# EAGLE board macroTriggerBRD (EAGLE 9.7.0)
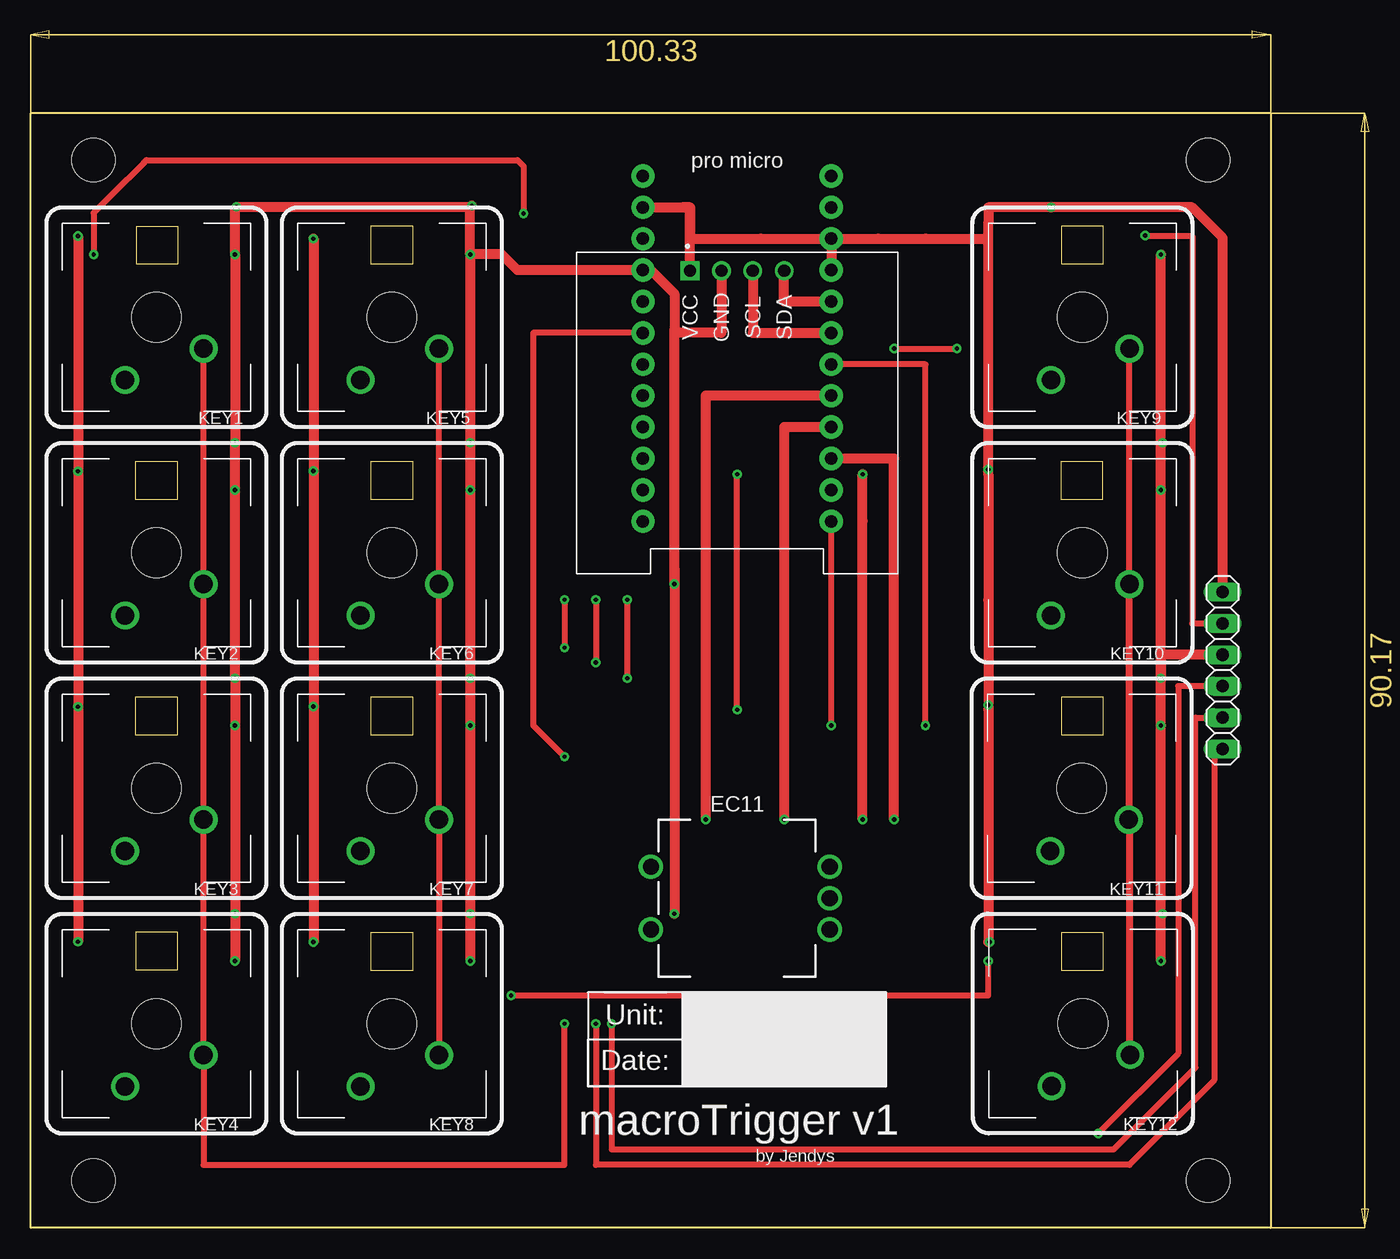
[diagram p0: board, top side]
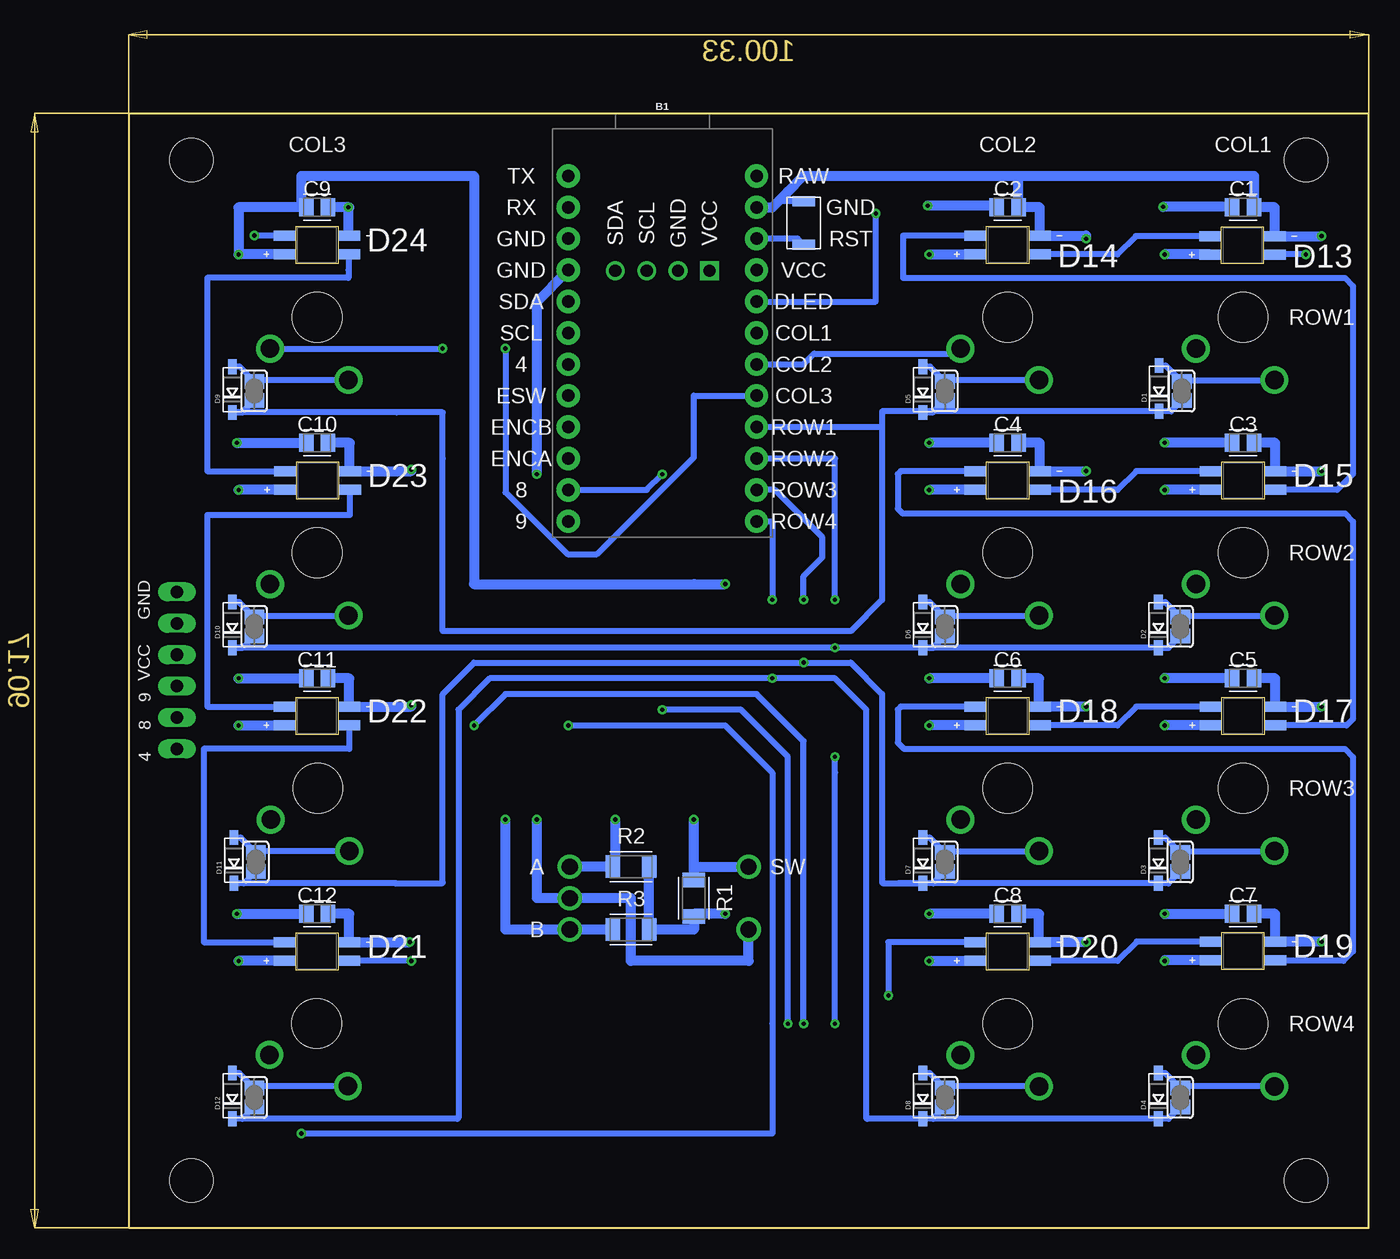
[diagram p1: board, bottom side, seen from below]

Size 100.33 x 90.17 mm. Coordinates in mm from the lower left corner, seen from the top.
Outline: 100.33,0 0,0 0,90.17 100.33,90.17 100.33,0
Copper layers (1*16): Top 0.035mm / dielectric 1.5mm / Bottom 0.035mm
Design rules "Fusion Electronics Design Rules": minimum track width 6mil, minimum drill 0.35mm, track to track 0.2mm, track to pad 0.2mm, pad to pad 0.2mm, via to via 0.2mm, smd to smd 0.2mm, copper to edge 0.2mm, drill to drill 0.2mm, minimum pad ring 10mil, minimum via ring 8mil, stop-mask expansion 4mil, vias tented up to drill 0mil, thermal gap 10mil
Holes 3.5 mm at 5.08,86.36 5.08,3.81 95.25,86.36 95.25,3.81

## Footprints (pad centres in the part's own frame; a part is rotated, then mirrored left to right if it is on the bottom)
SPARKFUN_PRO_MICRO = drill 1.016 pad 1.88: 1 -7.62,12.7; 2 -7.62,10.16; 3 -7.62,7.62; 4 -7.62,5.08; 5 -7.62,2.54; 6 -7.62,0; 7 -7.62,-2.54; 8 -7.62,-5.08; 9 -7.62,-7.62; 10 -7.62,-10.16; 11 -7.62,-12.7; 12 -7.62,-15.24; 13 7.62,-15.24; 14 7.62,-12.7; 15 7.62,-10.16; 16 7.62,-7.62; 17 7.62,-5.08; 18 7.62,-2.54; 19 7.62,0; 20 7.62,2.54; 21 7.62,5.08; 22 7.62,7.62; 23 7.62,10.16; 24 7.62,12.7
CAPC2012X110 = smd 1.165 x 1.465: 1 -0.875,0; 2 0.875,0
SOD-123 = smd 1.2 x 0.7: A 1.85,0; C -1.85,0
LED_SK6812-E = smd 1.8 x 0.82: 1 2.6,0.75; 2 2.6,-0.75; 3 -2.6,-0.75; 4 -2.6,0.75
ROTARY_ENC_PLAIN = drill 1.3: A 7.493,-2.54; B 7.493,2.54; C 7.493,0; SW+ -6.985,2.54; SW- -6.985,-2.54
CHERRY-MX = drill 1.5 pad 2.184: SW1 -3.81,2.54; SW2 2.54,5.08 | hole 4: 0,0
RESC3216X70 = smd 1.165 x 1.815: 1 -1.475,0; 2 1.475,0
B3U-1000P(M) = smd 0.8 x 1.8: 1 -1.75,0; 2 1.75,0
SJ = smd 1.168 x 1.6: 1 -0.762,0; 2 0.762,0
MODULE_DM-OLED096-636 = drill 1 square: 1 -3.81,11.5 | drill 1: 2 -1.27,11.5; 3 1.27,11.5; 4 3.81,11.5
1X06 = drill 1.016 long: 1 -6.35,0; 2 -3.81,0; 3 -1.27,0; 4 1.27,0; 5 3.81,0; 6 6.35,0

## Placement (x,y rotation side)
B1  SPARKFUN_PRO_MICRO  [SPARKFUN_PRO_MICRO]  57.15,72.39 0 bottom
C1  [CAPC2012X110]  10.16,82.55 180 bottom
C2  [CAPC2012X110]  29.21,82.55 180 bottom
C3  [CAPC2012X110]  10.16,63.5 180 bottom
C4  [CAPC2012X110]  29.21,63.5 180 bottom
C5  [CAPC2012X110]  10.16,44.45 180 bottom
C6  [CAPC2012X110]  29.21,44.45 180 bottom
C7  [CAPC2012X110]  10.16,25.4 180 bottom
C8  [CAPC2012X110]  29.21,25.4 180 bottom
C9  [CAPC2012X110]  85.09,82.55 180 bottom
C10  [CAPC2012X110]  85.09,63.5 180 bottom
C11  [CAPC2012X110]  85.09,44.45 180 bottom
C12  [CAPC2012X110]  85.09,25.4 180 bottom
D1  [SOD-123]  16.96,67.9 90 bottom
D2  [SOD-123]  17.02,48.77 90 bottom
D3  [SOD-123]  17.02,29.72 90 bottom
D4  [SOD-123]  17.02,10.67 90 bottom
D5  [SOD-123]  36.07,67.8 90 bottom
D6  [SOD-123]  36.07,48.77 90 bottom
D7  [SOD-123]  36.07,29.72 90 bottom
D8  [SOD-123]  36.07,10.67 90 bottom
D9  [SOD-123]  91.95,67.8 90 bottom
D10  [SOD-123]  91.95,48.77 90 bottom
D11  [SOD-123]  91.82,29.72 90 bottom
D12  [SOD-123]  91.95,10.67 90 bottom
D13  SK6812-EJ  [LED_SK6812-E]  10.2,79.47 180 bottom
D14  SK6812-EJ  [LED_SK6812-E]  29.21,79.5 180 bottom
D15  SK6812-EJ  [LED_SK6812-E]  10.16,60.45 180 bottom
D16  SK6812-EJ  [LED_SK6812-E]  29.21,60.45 180 bottom
D17  SK6812-EJ  [LED_SK6812-E]  10.16,41.4 180 bottom
D18  SK6812-EJ  [LED_SK6812-E]  29.21,41.4 180 bottom
D19  SK6812-EJ  [LED_SK6812-E]  10.17,22.39 180 bottom
D20  SK6812-EJ  [LED_SK6812-E]  29.21,22.35 180 bottom
D21  SK6812-EJ  [LED_SK6812-E]  85.09,22.35 180 bottom
D22  SK6812-EJ  [LED_SK6812-E]  85.09,41.4 180 bottom
D23  SK6812-EJ  [LED_SK6812-E]  85.05,60.45 180 bottom
D24  SK6812-EJ  [LED_SK6812-E]  85.09,79.5 180 bottom
ENCODER_A  ENCODER-SWITCH  [ROTARY_ENC_PLAIN]  57.15,26.67 0 top
KEY1  CHERRY-MX  [CHERRY-MX]  10.16,73.66 180 top
KEY2  CHERRY-MX  [CHERRY-MX]  10.16,54.61 180 top
KEY3  CHERRY-MX  [CHERRY-MX]  10.16,35.56 180 top
KEY4  CHERRY-MX  [CHERRY-MX]  10.16,16.51 180 top
KEY5  CHERRY-MX  [CHERRY-MX]  29.21,73.66 180 top
KEY6  CHERRY-MX  [CHERRY-MX]  29.21,54.61 180 top
KEY7  CHERRY-MX  [CHERRY-MX]  29.21,35.56 180 top
KEY8  CHERRY-MX  [CHERRY-MX]  29.21,16.51 180 top
KEY9  CHERRY-MX  [CHERRY-MX]  85.09,73.66 180 top
KEY10  CHERRY-MX  [CHERRY-MX]  85.09,54.61 180 top
KEY11  CHERRY-MX  [CHERRY-MX]  85.03,35.56 180 top
KEY12  CHERRY-MX  [CHERRY-MX]  85.13,16.53 180 top
R1  10k  [RESC3216X70]  54.61,26.67 270 bottom
R2  10k  [RESC3216X70]  59.69,29.21 0 bottom
R3  10k  [RESC3216X70]  59.69,24.13 0 bottom
S1  B3U-1000P(M)  [B3U-1000P(M)]  45.72,81.28 90 bottom
SJ1  [SJ]  15.24,48.64 90 bottom
SJ2  [SJ]  15.24,29.59 90 bottom
SJ3  [SJ]  15.24,10.54 90 bottom
SJ4  [SJ]  34.29,67.69 90 bottom
SJ5  [SJ]  34.29,48.64 90 bottom
SJ6  [SJ]  34.29,29.59 90 bottom
SJ7  [SJ]  34.29,10.54 90 bottom
SJ8  [SJ]  90.17,67.69 90 bottom
SJ9  [SJ]  90.17,48.64 90 bottom
SJ10  [SJ]  90.04,29.59 90 bottom
SJ11  [SJ]  90.17,10.54 90 bottom
SJ14  [SJ]  15.11,67.69 90 bottom
U1  DM-OLED096-636  [MODULE_DM-OLED096-636]  57.15,65.91 0 top
U$1  PINHD-1X06_1X06M  [1X06]  96.44,45.09 270 top

## Library data of the parts
B1 = SparkFun-Boards
C1-C12 = Capacitor; CATEGORY: Capacitor; PACKAGE_SIZE: 0805; PACKAGE_TYPE: SMD; SUBCATEGORY: Ceramic Capacitors; TYPE: MLCC
D1-D12 = adafruit
D13-D24 = SK6812-E; AVAILABILITY: Not in stock; CHECK_PRICES: https://www.snapeda.com/parts/SK6812-E/DONGGUANG+OPSCO+OPTOELECTRONICS+CO.%252C+LTD/view-part/?ref=eda; DESCRIPTION: SK6812MINI-E is a smart LED control circuit and light emitting circuit in one controlled LED source, which has the shape of a 3528 LED chip.; MF: DONGGUANG OPSCO OPTOELECTRONICS CO., LTD; MP: SK6812-E; PACKAGE: Package; PRICE: None; SNAPEDA_LINK: https://www.snapeda.com/parts/SK6812-E/DONGGUANG+OPSCO+OPTOELECTRONICS+CO.%252C+LTD/view-part/?ref=snap
ENCODER_A = SparkFun-Switches_ryan_edits; SF_SKU: COM-09117
KEY1-KEY4 KEY6-KEY12 = cherrymx
KEY5 = cherrymx; SPICEPREFIX: B
R1-R3 = Resistor; CATEGORY: Resistor; SUB-CATEGORY: Fixed
S1 = Switch; CATEGORY: SWITCH; DESCRIPTION: Ultra-small Surface-mounting Tactile Switches with High Contact Reliability; MANUFACTURER: OMRON; OPERATING_TEMPERATURE: -25°C to +70°C at 60%RH max; PART_STATUS: ACTIVE; ROHS_COMPLIANCE: RoHS Compliant; SERIES: B3U; TYPE: Tactile
SJ1-SJ11 SJ14 = jumper
U1 = DM-OLED096-636; AVAILABILITY: Not in stock; CHECK_PRICES: https://www.snapeda.com/parts/DM-OLED096-636/Display+Module/view-part/?ref=eda; DESCRIPTION: 0.96” 128 X 64 MONOCHROME GRAPHIC OLED DISPLAY MODULE - I2C; MF: Display Module; MP: DM-OLED096-636; PACKAGE: Package; PRICE: None; SNAPEDA_LINK: https://www.snapeda.com/parts/DM-OLED096-636/Display+Module/view-part/?ref=snap
U$1 = Tinkercad

## Nets
GND: B1.3 B1.4 B1.23 C1.1 C2.1 C3.1 C4.1 C5.1 C6.1 C7.1 C8.1 C9.1 C10.1 C11.1 C12.1 D13.3 D14.3 D15.3 D16.3 D17.3 D18.3 D19.3 D20.3 D21.3 D22.3 D23.3 D24.3 ENCODER_A.C ENCODER_A.SW- S1.2 U1.1 U$1.1
N$1: B1.22 S1.1
N$2: D1.A KEY1.SW2 SJ14.2
N$3: D2.A KEY2.SW2 SJ1.2
N$4: B1.15 D2.C D6.C D10.C SJ1.1 SJ5.1 SJ9.1
N$5: D24.2 U$1.2
N$6: B1.10 ENCODER_A.A R3.1
N$7: D3.A KEY3.SW2 SJ2.2
N$8: B1.19 KEY1.SW1 KEY2.SW1 KEY3.SW1 KEY4.SW1
N$9: D13.2 D14.4
N$10: D4.A KEY4.SW2 SJ3.2
N$11: B1.20 D13.4
N$12: D5.A KEY5.SW2 SJ4.2
N$13: D6.A KEY6.SW2 SJ5.2
N$14: B1.13 D4.C D8.C D12.C SJ3.1 SJ7.1 SJ11.1
N$15: D7.A KEY7.SW2 SJ6.2
N$16: D8.A KEY8.SW2 SJ7.2
N$17: D9.A KEY9.SW2 SJ8.2
N$18: D10.A KEY10.SW2 SJ9.2
N$19: B1.14 D3.C D7.C D11.C SJ2.1 SJ6.1 SJ10.1
N$20: D11.A KEY11.SW2 SJ10.2
N$21: D12.A KEY12.SW2 SJ11.2
N$22: B1.11 U$1.5
N$23: B1.12 U$1.4
N$24: B1.7 U$1.6
N$25: D14.2 D15.4
N$26: D15.2 D16.4
N$27: B1.18 KEY5.SW1 KEY6.SW1 KEY7.SW1 KEY8.SW1
N$28: B1.9 ENCODER_A.B R2.1
N$29: B1.8 ENCODER_A.SW+ R1.1
N$30: B1.5 U1.4
N$31: B1.6 U1.3
N$32: B1.17 KEY9.SW1 KEY10.SW1 KEY11.SW1 KEY12.SW1
N$33: D16.2 D17.4
N$34: B1.16 D1.C D5.C D9.C SJ4.1 SJ8.1 SJ14.1
N$35: D17.2 D18.4
N$37: D18.2 D19.4
N$38: D19.2 D20.4
N$39: D20.2 D21.4
N$40: D21.2 D22.4
N$42: D22.2 D23.4
N$43: D23.2 D24.4
RAW: B1.24
VCC: B1.21 C1.2 C2.2 C3.2 C4.2 C5.2 C6.2 C7.2 C8.2 C9.2 C10.2 C11.2 C12.2 D13.1 D14.1 D15.1 D16.1 D17.1 D18.1 D19.1 D20.1 D21.1 D22.1 D23.1 D24.1 R1.2 R2.2 R3.2 U1.2 U$1.3

## Tracks (layer width: path | path; a pad name or v marks a point on that pad's centre or on a via)
GND  (via drill 0.35)
  Top 0.8: 77.47,80.01 v77.47,61.34 77.47,60.96 77.47,50.8 v77.47,42.29 77.47,41.91 77.47,23.11 v77.6,23.11 | 77.47,80.01 77.47,81.28 77.47,82.55 v82.55,82.55 93.98,82.55 96.44,80.09 U$1.1 | B1.3 68.58,80.01 72.39,80.01 77.47,80.01 | B1.3 B1.4 | B1.23 53.34,82.55 | 53.34,82.55 52.7,82.55 | B1.3 59.06,80.01 53.34,80.01 53.34,80.64 53.34,82.55 | v22.86,80.01 v22.86,61.21 v22.86,42.16 v22.86,23.11 | v3.81,80.22 v3.81,61.2 v3.81,42.15 v3.81,23.14 | v67.31,33.02 67.31,57.17 v67.31,60.96 | U1.1 53.34,82.55
  Bottom 0.5: 46.24,83.07 S1.2 47.78,83.03 48.26,82.55
  Bottom 0.8: ENCODER_A.SW- 50.16,21.59 59.69,21.59 59.69,26.67 ENCODER_A.C 67.31,26.67 v67.31,33.02 | B1.23 48.26,82.55 46.99,83.82 45.72,85.09 28.34,85.09 | C3.1 7.56,63.5 D15.3 v3.81,61.2 | C5.1 7.56,44.45 D17.3 v3.81,42.15 | C7.1 7.57,25.4 D19.3 v3.81,23.14 | C4.1 26.61,63.5 D16.3 v22.86,61.2 v22.86,61.21 | C6.1 26.67,44.45 26.67,42.15 D18.3 v22.86,42.15 v22.86,42.16 | D20.3 26.67,23.1 | 26.67,23.1 26.67,25.4 C8.1 | v82.55,82.55 C9.1 | 82.49,82.55 v82.55,82.55 | C12.1 82.49,25.4 D21.3 v77.6,23.1 v77.6,23.11 | C11.1 82.49,44.45 D22.3 77.47,42.15 v77.47,42.29 | C10.1 82.49,63.5 82.45,63.5 D23.3 77.47,61.2 v77.47,61.34 | D24.3 82.55,80.25 v82.55,82.55 | 28.34,85.09 9.29,85.09 C1.1 7.6,82.55 D13.3 v3.81,80.22 | 28.34,85.09 C2.1 26.61,82.55 D14.3 22.86,80.25 v22.86,80.01 | v22.86,23.11 26.67,23.11 26.67,23.1 | v67.31,60.96 67.31,74.91 66.05,76.17 66.05,76.19 B1.4
N$1
  Bottom 0.5: S1.1 46.2,80.01 B1.22
N$2
  Bottom 0.5: KEY1.SW2 14.99,68.58 SJ14.2 16.41,69.75 D1.A
N$3
  Bottom 0.5: KEY2.SW2 15.11,49.53 SJ1.2 16.45,50.62 D2.A
N$4  (via drill 0.35)
  Top 0.5: v43.18,50.8 v43.18,46.92
  Bottom 0.5: SJ9.1 91.13,46.92 D10.C v43.18,46.92 D6.C | SJ5.1 35.25,46.92 D6.C | SJ1.1 16.2,46.92 D2.C D6.C | B1.15 43.18,62.23 v43.18,50.8
N$5  (via drill 0.35)
  Top 0.5: v90.17,80.26 93.98,80.26 93.98,48.9 U$1.2
  Bottom 0.5: v90.17,80.26 90.13,80.3 90.13,80.25 D24.2
N$6  (via drill 0.35)
  Top 0.8: B1.10 69.85,62.23 v69.85,33.02
  Bottom 0.8: R3.1 ENCODER_A.A 69.85,24.13 v69.85,33.02
N$7
  Bottom 0.5: KEY3.SW2 15.11,30.48 SJ2.2 16.45,31.57 D3.A
N$8  (via drill 0.35)
  Top 0.5: KEY1.SW1 KEY2.SW1 KEY3.SW1 KEY4.SW1 13.97,5.08 22.86,5.08 43.18,5.08 v43.18,16.51 | v43.18,38.1 40.64,40.64 40.64,72.39 B1.19
  Bottom 0.5: v43.18,16.51 43.18,36.83 v43.18,38.1
N$9
  Bottom 0.5: D13.2 18.84,80.22 20.32,78.74 26.6,78.74 D14.4
N$10
  Bottom 0.5: KEY4.SW2 15.11,11.43 SJ3.2 16.45,12.52 D4.A
N$11  (via drill 0.35)
  Top 0.5: 6.33,83.34 6.58,83.59 | 6.58,83.59 9.12,86.13 | 9.12,86.13 9.35,86.36 | 9.12,86.13 9.35,86.36 | 6.58,83.59 5.08,82.09 v5.08,78.74 | 9.35,86.36 39.37,86.36 39.87,85.86 v39.87,82.05
  Bottom 0.5: v5.08,78.74 7.58,78.74 D13.4 | B1.20 39.87,74.93 v39.87,82.05
N$12
  Bottom 0.5: 34.16,68.58 SJ4.2 | SJ4.2 35.49,69.65 D5.A | KEY5.SW2 34.16,68.58 | 34.16,68.58 SJ4.2
N$13
  Bottom 0.5: 34.16,49.53 SJ5.2 | SJ5.2 35.51,50.62 D6.A | 34.16,49.53 KEY6.SW2 | 34.16,49.53 SJ5.2
N$14  (via drill 0.35)
  Top 0.5: v48.26,50.8 v48.26,44.45
  Bottom 0.5: SJ11.1 91.13,8.82 D12.C 73.73,8.82 73.66,8.89 73.66,41.91 71.12,44.45 v48.26,44.45 43.18,44.45 40.64,41.91 40.64,8.89 40.57,8.82 D8.C | SJ3.1 16.2,8.82 D4.C D8.C | SJ7.1 35.25,8.82 D8.C | D8.C 36.14,8.89 | B1.13 48.26,57.15 v48.26,50.8
N$15
  Bottom 0.5: 34.16,30.48 SJ6.2 | 35.51,31.57 D7.A 35.51,31.57 | SJ6.2 35.51,31.57 | 34.16,30.48 KEY7.SW2 | 34.16,30.48 SJ6.2
N$16
  Bottom 0.5: KEY8.SW2 34.16,11.43 SJ7.2 35.51,12.52 D8.A
N$17
  Bottom 0.5: KEY9.SW2 90.04,68.58 SJ8.2 91.37,69.65 D9.A
N$18
  Bottom 0.5: KEY10.SW2 90.04,49.53 SJ9.2 91.39,50.62 D10.A
N$19  (via drill 0.35)
  Top 0.5: v45.72,50.8 v45.72,45.72
  Bottom 0.5: SJ10.1 91,27.87 91.44,27.87 | 91.44,27.87 D11.C | SJ2.1 16.2,27.87 D3.C 38.1,27.87 | SJ6.1 35.25,27.87 D7.C | 78.67,27.87 78.74,27.87 | 78.74,27.87 91.44,27.87 | D7.C 36.07,27.94 | 78.74,27.87 75,27.87 74.93,27.94 74.93,43.18 72.39,45.72 v45.72,45.72 41.91,45.72 39.37,43.18 39.37,27.94 39.3,27.87 38.1,27.87 | 38.1,27.87 D7.C | v45.72,50.8 45.72,52.71 44.2,54.23 44.2,55.85 48.04,59.69 B1.14
N$20
  Bottom 0.5: KEY11.SW2 89.92,30.48 SJ10.2 91.26,31.57 D11.A
N$21
  Bottom 0.5: KEY12.SW2 90.02,11.45 SJ11.2 91.39,12.52 D12.A
N$22  (via drill 0.35)
  Top 0.5: v46.99,16.51 46.99,6.35 87.63,6.35 94.23,12.95 94.23,41.27 U$1.5 | v57.15,41.91 v57.15,60.96
  Bottom 0.5: v46.99,16.51 46.99,38.1 50.8,41.91 v57.15,41.91 | B1.11 58.42,59.69 v57.15,60.96
N$23  (via drill 0.35)
  Top 0.5: v64.77,40.64 B1.12 | U$1.4 92.84,43.82 92.84,14.1 v86.36,7.62
  Bottom 0.5: v86.36,7.62 48.26,7.62 48.26,16.51 48.26,36.83 52.07,40.64 v64.77,40.64
N$24  (via drill 0.35)
  Top 0.5: v45.72,16.51 45.72,5.08 88.9,5.08 95.76,11.94 95.76,38.05 U$1.6 | v72.39,40.64 72.39,69.85 B1.7
  Bottom 0.5: v45.72,16.51 45.72,39.37 49.53,43.18 69.85,43.18 v72.39,40.64
N$25
  Bottom 0.5: 5.08,76.84 4.95,76.84 | 5.08,76.84 1.91,76.84 1.27,76.2 1.27,60.96 2.54,59.69 7.55,59.69 D15.4 | 5.08,76.84 37.68,76.84 37.68,80.25 D14.2
N$26
  Bottom 0.5: D15.2 18.81,61.2 20.32,59.69 26.6,59.69 D16.4
N$27
  Top 0.5: KEY5.SW1 KEY6.SW1 KEY7.SW1 KEY8.SW1
  Bottom 0.5: B1.18 45.72,69.85 44.87,70.7 33.44,70.7 KEY5.SW1
N$28  (via drill 0.35)
  Top 0.8: B1.9 60.96,64.77 v60.96,33.02
  Bottom 0.8: ENCODER_A.B R2.1 60.96,29.21 v60.96,33.02
N$29  (via drill 0.35)
  Top 0.8: v54.61,33.02 54.61,50.8 54.61,67.31 B1.8
  Bottom 0.8: ENCODER_A.SW+ 54.61,29.21 R1.1 v54.61,33.02
N$30
  Top 0.8: B1.5 60.96,74.93 U1.4
N$31
  Top 0.8: B1.6 58.42,72.39 U1.3
N$32  (via drill 0.35)
  Top 0.5: 88.9,33.02 KEY10.SW1 | KEY10.SW1 KEY9.SW1 | v69.85,71.12 v74.93,71.12 | 88.94,32.98 KEY12.SW1 88.9,14.04 88.9,33.02 | 88.94,32.98 88.9,33.02 | KEY10.SW1 88.94,52.03 88.94,32.98 | KEY11.SW1 88.84,52.01 KEY10.SW1
  Bottom 0.5: KEY9.SW1 v74.93,71.12 | B1.17 54.61,67.31 54.61,62.33 62.45,54.49 64.84,54.49 69.85,59.5 v69.85,71.12
N$33
  Bottom 0.5: D16.2 37.86,61.2 38.1,60.96 38.1,58.17 37.72,57.79 2.03,57.79 1.91,57.79 1.27,57.15 1.27,41.15 1.78,40.64 7.55,40.64 D17.4
N$34
  Bottom 0.5: SJ8.1 91.14,65.95 D9.C 78.65,65.95 74.93,65.95 74.93,62.23 74.93,48.26 71.12,48.26 41.91,48.26 39.37,50.8 39.37,58.42 39.37,62.65 39.37,64.77 | SJ4.1 35.27,65.95 D5.C | SJ14.1 15.99,66.05 D1.C 35.97,66.05 | 35.97,66.05 D5.C | D5.C 36.15,66.04 | 39.37,66.04 39.37,64.77 | 39.36,66.05 39.37,66.04 | 35.97,66.05 D5.C | D5.C 36.15,66.04 | 36.15,66.04 39.37,66.04 | 39.37,64.77 B1.16
N$35
  Bottom 0.5: D17.2 18.81,42.15 20.32,40.64 26.6,40.64 D18.4
N$37
  Bottom 0.5: D18.2 37.86,42.15 38.1,41.91 38.1,39.24 37.59,38.73 2.54,38.73 1.91,38.73 1.27,38.1 1.27,22.35 2.03,21.59 7.52,21.59 D19.4
N$38
  Bottom 0.5: D19.2 18.77,23.14 20.32,21.59 26.6,21.59 D20.4
N$39  (via drill 0.35)
  Top 0.5: v38.86,18.8 77.47,18.8 v77.47,21.59
  Bottom 0.5: D20.2 38.86,23.1 v38.86,18.8 | v77.47,21.59 D21.4
N$40
  Bottom 0.5: D22.4 82.49,38.73 94.27,38.73 94.27,23.1 D21.2
N$42
  Bottom 0.5: D23.4 82.45,57.66 93.98,57.66 93.98,42.15 D22.2
N$43
  Bottom 0.5: D24.4 82.55,78.75 82.55,77.47 82.55,76.84 93.98,76.84 93.98,61.21 93.98,61.2 D23.2
VCC  (via drill 0.35)
  Top 0.8: v16.51,63.5 v16.51,63.51 | v52.07,25.4 52.07,53.34 v52.07,52.07 52.07,72.39 | v91.44,44.45 91.44,46.36 U$1.3 | v91.57,63.5 91.44,63.63 | 91.44,63.63 v91.44,78.74 | 35.6,82.59 v35.69,82.68 35.6,82.59 | v16.51,63.5 v16.51,59.69 v16.51,44.46 v16.51,40.64 v16.51,25.4 v16.51,21.59 | 35.6,82.59 v16.64,82.59 16.51,82.46 v16.51,78.74 v16.51,63.5 | v91.44,21.59 91.44,25.4 | 91.44,25.4 v91.57,25.4 91.44,25.4 | 91.44,25.4 91.44,25.53 v91.44,40.64 v91.44,44.45 | v91.44,44.45 v91.44,59.69 91.44,63.63 | v35.56,78.74 38.1,78.74 39.37,77.47 B1.21 50.16,77.47 52.07,75.56 52.07,72.64 52.07,72.39 | v35.56,78.74 35.56,82.59 35.6,82.59 | v35.56,78.74 v35.56,63.5 v35.56,59.69 v35.56,44.45 v35.56,40.64 v35.56,25.4 v35.56,21.59 | U1.2 55.88,72.39 52.07,72.39
  Bottom 0.8: R2.2 R3.2 54.61,24.13 R1.2 54.61,25.4 v52.07,25.4 | v91.57,63.5 C10.2 | v91.44,44.45 C11.2 | v91.57,25.4 C12.2 | D13.1 12.8,78.74 v16.51,78.74 | D15.1 16.51,59.7 v16.51,59.69 | C3.2 v16.51,63.51 | C1.2 11.03,82.59 v16.64,82.59 | C5.2 v16.51,44.46 | D17.1 16.51,40.65 v16.51,40.64 | v16.51,25.4 C7.2 | D21.1 91.44,21.6 v91.44,21.59 | v91.44,59.69 91.44,59.7 D23.1 | v91.44,40.64 91.44,40.65 D22.1 | D24.1 91.44,78.75 v91.44,78.74 91.44,82.55 C9.2 86.36,82.95 86.36,85.09 72.39,85.09 72.39,52.07 54.56,52.07 v52.07,52.07 | v35.56,21.59 D20.1 | D18.1 35.56,40.65 v35.56,40.64 | D16.1 35.56,59.7 v35.56,59.69 | C4.2 v35.56,63.5 | D14.1 35.56,78.75 v35.56,78.74 | C6.2 v35.56,44.45 | C8.2 v35.56,25.4 | D19.1 16.46,21.64 v16.51,21.59 | C2.2 30.21,82.68 v35.69,82.68

## Text on the board
tNames: pro micro | VCC | GND | SCL | SDA | EC11 | Unit: | Date: | macroTrigger v1 | by Jendys
bNames: COL1 | COL2 | COL3 | RAW | TX | GND | RX | VCC | GND | SCL | SDA | RST | GND | VCC | GND | DLED | SDA | ROW1 | COL1 | SCL | COL2 | 4 | COL3 | ESW | ROW1 | ENCB | ROW2 | ENCA | ROW3 | 8 | ROW4 | 9 | ROW2 | GND | VCC | 9 | 8 | 4 | ROW3 | SW | A | B | ROW4